# EAGLE board jointbutt (EAGLE 6.6.0)

Size 35.93 x 50.25 mm. Coordinates in mm from the lower left corner, seen from the top.
Outline: 0,0 35.93,0 35.93,50.25 0,50.25 0,0
Copper layers (1*16): Top 0.035mm / dielectric 1.5mm / Bottom 0.035mm
Design rules "default": minimum track width 10mil, minimum drill 24mil, track to track 8mil, track to pad 8mil, pad to pad 8mil, via to via 8mil, smd to smd 8mil, copper to edge 40mil, drill to drill 8mil, minimum pad ring 10mil, minimum via ring 8mil, stop-mask expansion 4mil, vias tented up to drill 0mil, thermal gap 10mil

## Footprints (pad centres in the part's own frame; a part is rotated, then mirrored left to right if it is on the bottom)
TRAIN_CONNECTOR = smd 1 x 14: P$1 -5,5; P$2 4,5
2,8 = hole 2.8: 0,0
4,1 = hole 4.1: 0,0

## Placement (x,y rotation side)
E$1  [TRAIN_CONNECTOR]  18,37 0 top
E$2  [TRAIN_CONNECTOR]  18,20 0 top
E$3  [TRAIN_CONNECTOR]  18,3 0 top
E$4  [2,8]  2,33 0 top
E$5  [2,8]  6,33 0 top
E$6  [2,8]  10,33 0 top
E$7  [2,8]  14,33 0 top
E$8  [2,8]  18,33 0 top
E$9  [2,8]  22,33 0 top
E$10  [2,8]  26,33 0 top
E$11  [2,8]  30,33 0 top
E$12  [2,8]  2,16 0 top
E$13  [2,8]  6,16 0 top
E$14  [2,8]  10,16 0 top
E$15  [2,8]  14,16 0 top
E$16  [2,8]  18,16 0 top
E$17  [2,8]  22,16 0 top
E$18  [2,8]  26,16 0 top
E$19  [2,8]  30,16 0 top
E$20  [2,8]  34,16 0 top
E$21  [2,8]  34,33 0 top
U$1  [4,1]  5.35,41.91 0 top
U$2  [4,1]  5.35,7.91 0 top
U$4  [4,1]  30.09,42.09 180 top
U$5  [4,1]  5.35,24.91 0 top
U$6  [4,1]  30.35,24.91 0 top
U$7  [4,1]  30.35,7.91 0 top

## Library data of the parts
E$1-E$3 = trainLib
E$4-E$21 U$1 U$2 U$4-U$7 = holes